# Altium PCB STM32F446xx PCB Design.PcbDoc
Units mil, origin at the board's own origin, x right, y up, seen from the top; angles counter-clockwise.
Board outline 6000 x 4000 mil, 2 copper layers (Top Layer, Bottom Layer); 48 components, 67 nets, 260 pads, 0 vias.
Unrouted connection lines stored in the file: 169.
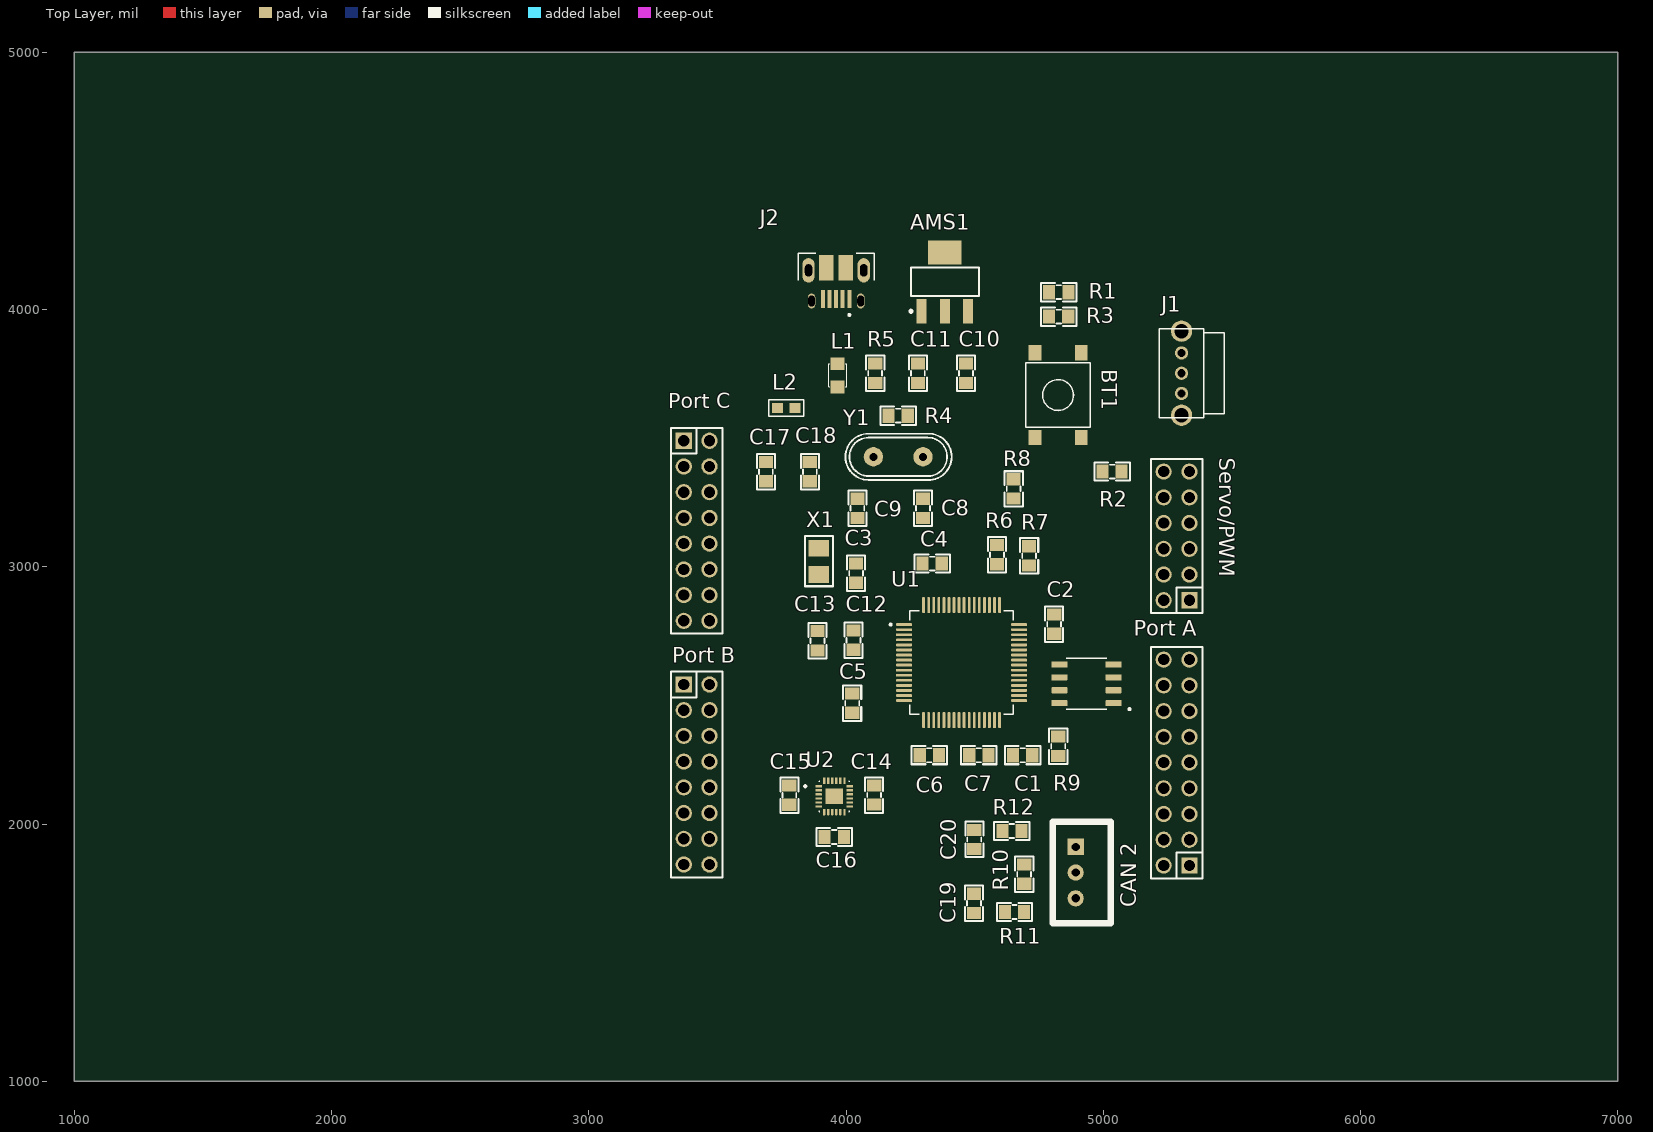
[diagram p0: Top Layer view]
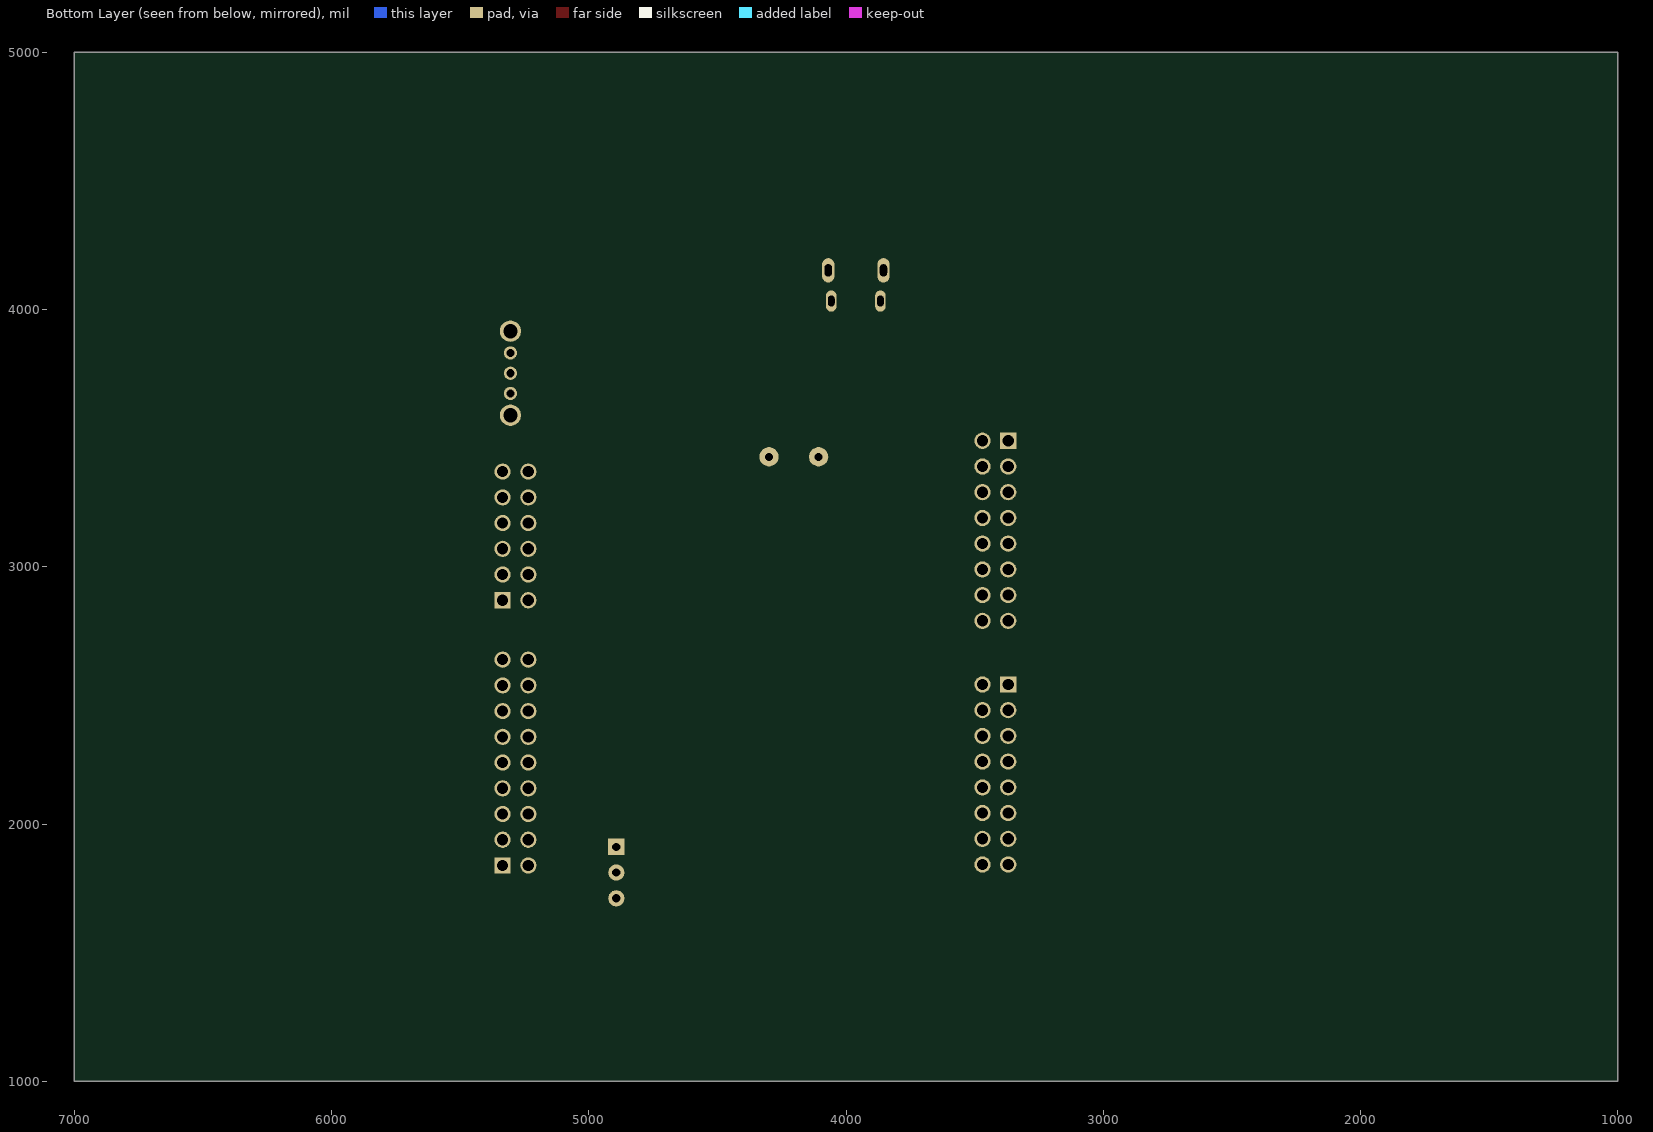
[diagram p1: Bottom Layer view, seen from below]

## Layer stack, top to bottom
Top Solder: solder mask 0.4, Solder Resist, Dk 3.5
Top Layer: signal copper 1.4
Dielectric 1: dielectric 12.6, FR-4, Dk 4.8
Bottom Layer: signal copper 1.4
Bottom Solder: solder mask 0.4, Solder Resist, Dk 3.5

## Board outline
1000,1000 7000,1000 7000,5000 1000,5000

## Design rules (kind name [scope] priority, off if disabled: settings)
Clearance [All] p1: gap=10 ignorepadtopadclearanceinfootprint=FALSE except(0: Arc-Hole Track-Hole SMDPad-Hole THPad-Hole Via-Hole Fill-Hole Poly-Hole Region-Hole Text-Hole)
PolygonConnect [All] p1: connectstyle=Relief reliefconductorwidth=10 reliefentries=4 polygonreliefangle="90 Angle" airgapwidth=10
RoomDefinition "STM32F446xx Schematic design" [InComponentClass('STM32F446xx Schematic design')] p1: confinementstyle=ConfineIn formatcopy=TRUE lockcomponents=FALSE outline 7209.38,1077.44 14919.38,1077.44 14919.38,2097.44 7209.38,2097.44
RoutingVias [All] p1: holewidth=28 width=50 viastyle="Through Hole" minholewidth=28 minwidth=50 maxholewidth=28 maxwidth=50
SolderMaskExpansion [All] p1: expansion=4 istentingtop=FALSE
Width [All] p1: maxlimit=10 minlimit=10 preferedwidth=10
30 further rules are at their usual default settings.

## Components (designator, comment, footprint, x,y, rotation, side; value= is the part's Value field where it differs from the comment)
AMS1 "AMS1117-3.3V" SOT223 4384.38,4107.44 r0 top value="AMS1117-3.3V SOT223"
BT1 "Nut Nhan 4 Chan SMD 6x6" "Nut Nhan 4 Chan SMD 6x6" 4824.38,3667.44 r90 top
C1 "100nF" "tu 0805" 4686.96,2267.3 r180 top
C2 "100nF" "tu 0805" 4809.38,2777.44 r270 top
C3 "100nF" "tu 0805" 4039.52,2975.21 r270 top
C4 "100nF" "tu 0805" 4334.38,3012.44 r0 top
C5 "100nF" "tu 0805" 4024.25,2469.86 r90 top
C6 "100nF" "tu 0805" 4324.38,2267.3 r180 top
C7 "2.2uF" "tu 0805" 4516.35,2267.3 r0 top
C8 "2.2uF" "tu 0805" 4299.38,3227.44 r270 top
C9 "2.2uF" "tu 0805" 4044.38,3227.44 r270 top
C10 "2.2uF" "tu 0805" 4466.61,3752.44 r270 top
C11 "2.2uF" "tu 0805" 4279.62,3752.44 r270 top
C12 "12pF" "tu 0805" 4029.52,2715.21 r270 top
C13 "12pF" "tu 0805" 3889.38,2712.44 r270 top
C14 "10nF" "tu 0805" 4109.38,2112.44 r90 top
C15 "100nF" "tu 0805" 3779.83,2112.44 r270 top
C16 "100nF" "tu 0805" 3954.38,1949.14 r180 top
C17 "100nF" "tu 0805" 3688.74,3370.21 r270 top
C18 "100nF" "tu 0805" 3859.52,3370.21 r270 top
C19 "560pF" "tu 0805" 4497.43,1691 r90 top
C20 "560pF" "tu 0805" 4498.73,1940 r270 top
CAN2 "CAN 2" SOIC127P599X175-8N 4935,2545 r180 top
"CAN 2" "CAN Transceiver" XH2.54M-3 4893.01,1911.18 r270 top
J1 "SK12D07VG4" SK12D07VG4 5304.38,3752.44 r90 top
J2 "10103594-0001LF" AMPHENOL_10103594-0001LF 3961.67,4152.44 r180 top
L1 "LED 0805" LED-0805-Green 3967.04,3699.15 r90 top
L2 "120R" "IND-0603 (1608)" 3767.85,3617.44 r0 top value=23R/4A
"Port A" "Port A" "JP 2x9 DT" 5285.04,2238.84 r90 top
"Port B" "Port B" "JP 2x8 DT" 3419.38,2192.44 r270 top
"Port C" "Port C" "JP 2x8 DT" 3419.38,3139.86 r270 top
R1 "10k" "tro smd 0805" 4826.81,4069.83 r0 top
R2 "10k" "tro smd 0805" 5034.38,3367.44 r180 top
R3 "10k" "tro smd 0805" 4826.61,3974.83 r0 top
R4 "1M" "tro smd 0805" 4202.93,3584.97 r180 top
R5 "1k" "tro smd 0805" 4115.9,3752.54 r270 top
R6 "20R" "tro smd 0805" 4589.38,3047.44 r270 top
R7 "20R" "tro smd 0805" 4714.38,3042.44 r270 top
R8 "4.7K" "tro smd 0805" 4649.38,3302.44 r90 top
R9 "4k7" "tro smd 0805" 4822.61,2302.23 r90 top
R10 "120R" "tro smd 0805" 4695,1805 r270 top
R11 "100R" "tro smd 0805" 4655,1660 r0 top
R12 "100R" "tro smd 0805" 4645,1975 r0 top
Servo/PWM "Servo/PWM" "JP 2x6 DT" 5285.04,3119.83 r90 top
U1 "STM32F446RET6" QFP50P1200X1200X160-64N 4449.38,2627.44 r0 top
U2 "MPU-9250" QFN40P300X300X105-25N 3954.38,2107.44 r0 top
X1 "32.768KHz" Crystal_ABS07_SMD-3.2x1.5MM 3894.38,3021.26 r270 top
Y1 "16Mhz" "Thach Anh 2 chan cam" 4202.93,3427.44 r180 top value=4Mhz

## Footprints (in the part's own frame and the unit in brackets; to place one, negate y for a bottom-side part, rotate by r counter-clockwise, add the part's x,y. Pads: shape width x height; smd on the part's side, far side on the other; paste and mask are expansions set on the pad)
AMPHENOL_10103594-0001LF [mm]
  rect 0.4x1.75 smd: 1(-1.3,2.825) 2(-0.65,2.825) 3(0,2.825) 4(0.65,2.825) 5(1.3,2.825)
  oval 0.73x1.46 hole 0.65 slot 1.05 at 90 deg mask+0: 6(-2.425,3.03) 7(2.425,3.03)
  oval 1.2x2.4 hole 0.7 slot 1.2 at 90 deg: 8(-2.725,0) 9(2.725,0)
  oval 1.05x2.1 smd far side paste-2: 10(-2.425,3.03) 11(2.425,3.03)
  rect 1.425x2.5 smd: S1(-0.962,-0.25) S2(0.962,-0.25)
  silkscreen extent -3.75,-1.7 3.75,4.5, body extent -4.02,-4.15 4.02,1.88, height 2.95
Crystal_ABS07_SMD-3.2x1.5MM [mm] "Crystal 3.2x1.5mm"
  rect 1.65x2 smd: 1(-1.3,0) 2(1.3,0)
  silkscreen extent -2.49,-1.37 2.46,1.38, body extent -1.6,-0.75 1.6,0.75, height 0.81
"IND-0603 (1608)" [mm] "Resistor, Chip; 1.60 mm L X 0.80 mm W X 0.50 mm H body"
  rect 1.1x1 smd mask+0.1: 1(-0.85,0) 2(0.85,0)
  silkscreen extent -1.71,-0.81 1.71,0.81, body extent -0.92,-0.56 0.92,0.56, height 0.9
"JP 2x6 DT" [mm] "12 pins, dual pin, straight, gold plating"
  rect 1.6x1.6 hole 1.1: 1(-6.35,-1.27)
  round 1.6 hole 1.1: 2(-3.81,-1.27) 3(-1.27,-1.27) 4(1.27,-1.27) 5(3.81,-1.27) 6(6.35,-1.27) 7(6.35,1.27) 8(3.81,1.27) 9(1.27,1.27) 10(-1.27,1.27) 11(-3.81,1.27) 12(-6.35,1.27)
  silkscreen extent -7.62,-2.54 7.62,2.54, body extent -7.62,-2.54 7.62,2.54, height 8.55
"JP 2x8 DT" [mm] "16 pins, dual pin, straight, gold plating"
  rect 1.6x1.6 hole 1.1: 1(-8.89,-1.27)
  round 1.6 hole 1.1: 2(-6.35,-1.27) 3(-3.81,-1.27) 4(-1.27,-1.27) 5(1.27,-1.27) 6(3.81,-1.27) 7(6.35,-1.27) 8(8.89,-1.27) 9(8.89,1.27) 10(6.35,1.27) 11(3.81,1.27) 12(1.27,1.27) 13(-1.27,1.27) 14(-3.81,1.27) 15(-6.35,1.27) 16(-8.89,1.27)
  silkscreen extent -10.16,-2.54 10.16,2.54, body extent -10.16,-2.54 10.16,2.54, height 8.55
"JP 2x9 DT" [mm] "18 pins, dual pin, straight, gold plating"
  rect 1.6x1.6 hole 1.1: 1(-10.16,-1.27)
  round 1.6 hole 1.1: 2(-7.62,-1.27) 3(-5.08,-1.27) 4(-2.54,-1.27) 5(0,-1.27) 6(2.54,-1.27) 7(5.08,-1.27) 8(7.62,-1.27) 9(10.16,-1.27) 10(10.16,1.27) 11(7.62,1.27) 12(5.08,1.27) 13(2.54,1.27) 14(0,1.27) 15(-2.54,1.27) 16(-5.08,1.27) 17(-7.62,1.27) 18(-10.16,1.27)
  silkscreen extent -11.43,-2.54 11.43,2.54, body extent -11.43,-2.54 11.43,2.54, height 8.55
LED-0805-Green [mil]
  rect 50x55 smd: 1(0,0) 2(90,0)
  silkscreen extent 0,-35 90,35, body extent 5,-25 85,25, height 43
"Nut Nhan 4 Chan SMD 6x6" [mil] "SW SMD button 4pin, 250 x250 mil"
  rect 60x50 smd: 1(-165,90) 2(165,-90) 3(165,90) 4(-165,-90)
  silkscreen extent -125,-125 125,125, body extent -180,-125 180,125, height 130
QFN40P300X300X105-25N [mm]
  rrect25% 0.64x0.22 smd: 1(-1.545,1) 2(-1.545,0.6) 3(-1.545,0.2) 4(-1.545,-0.2) 5(-1.545,-0.6) 6(-1.545,-1) 13(1.545,-1) 14(1.545,-0.6) 15(1.545,-0.2) 16(1.545,0.2) 17(1.545,0.6) 18(1.545,1)
  rrect25% 0.22x0.64 smd: 7(-1,-1.545) 8(-0.6,-1.545) 9(-0.2,-1.545) 10(0.2,-1.545) 11(0.6,-1.545) 12(1,-1.545) 19(1,1.545) 20(0.6,1.545) 21(0.2,1.545) 22(-0.2,1.545) 23(-0.6,1.545) 24(-1,1.545)
  rect 1.7x1.54 smd paste-2: 25(0,0)
  silkscreen extent -2.96,-1.5 1.5,1.5, body extent -1.5,-1.5 1.5,1.5, height 1
QFP50P1200X1200X160-64N [mm]
  rrect50% 1.56x0.28 smd: 1(-5.68,3.75) 2(-5.68,3.25) 3(-5.68,2.75) 4(-5.68,2.25) 5(-5.68,1.75) 6(-5.68,1.25) 7(-5.68,0.75) 8(-5.68,0.25) 9(-5.68,-0.25) 10(-5.68,-0.75) 11(-5.68,-1.25) 12(-5.68,-1.75) 13(-5.68,-2.25) 14(-5.68,-2.75) 15(-5.68,-3.25) 16(-5.68,-3.75) 33(5.68,-3.75) 34(5.68,-3.25) 35(5.68,-2.75) 36(5.68,-2.25) 37(5.68,-1.75) 38(5.68,-1.25) 39(5.68,-0.75) 40(5.68,-0.25) 41(5.68,0.25) 42(5.68,0.75) 43(5.68,1.25) 44(5.68,1.75) 45(5.68,2.25) 46(5.68,2.75) 47(5.68,3.25) 48(5.68,3.75)
  rrect50% 0.28x1.56 smd: 17(-3.75,-5.68) 18(-3.25,-5.68) 19(-2.75,-5.68) 20(-2.25,-5.68) 21(-1.75,-5.68) 22(-1.25,-5.68) 23(-0.75,-5.68) 24(-0.25,-5.68) 25(0.25,-5.68) 26(0.75,-5.68) 27(1.25,-5.68) 28(1.75,-5.68) 29(2.25,-5.68) 30(2.75,-5.68) 31(3.25,-5.68) 32(3.75,-5.68) 49(3.75,5.68) 50(3.25,5.68) 51(2.75,5.68) 52(2.25,5.68) 53(1.75,5.68) 54(1.25,5.68) 55(0.75,5.68) 56(0.25,5.68) 57(-0.25,5.68) 58(-0.75,5.68) 59(-1.25,5.68) 60(-1.75,5.68) 61(-2.25,5.68) 62(-2.75,5.68) 63(-3.25,5.68) 64(-3.75,5.68)
  silkscreen extent -7.1,-5.1 5.1,5.1
SK12D07VG4 [mm]
  round 1.308 hole 0.8: 1(-2,0) 2(2,0) COM(0,0)
  round 2.1 hole 1.4: M1(-4.15,0) M2(4.15,0)
  silkscreen extent -4.4,-4.2 4.4,2.2
SOIC127P599X175-8N [mm]
  rrect25% 1.58x0.6 smd: 1(-2.67,1.905) 2(-2.67,0.635) 3(-2.67,-0.635) 4(-2.67,-1.905) 5(2.67,-1.905) 6(2.67,-0.635) 7(2.67,0.635) 8(2.67,1.905)
  silkscreen extent -4.35,-2.52 1.99,2.6, body extent -3,-2.45 3,2.45, height 1.75
SOT223 [mm]
  rect 1x2.4 smd: 1(-2.3,-2.9) 2(0,-2.9) 3(2.3,-2.9)
  rect 3.3x2.4 smd: 4(0,2.9)
  silkscreen extent -3.47,-3.02 3.35,1.4, body extent -3.25,-3.56 3.25,3.4, height 1.68
"Thach Anh 2 chan cam" [mm]
  round 1.905 hole 0.8: 1(-2.45,0) 2(2.45,0)
  silkscreen extent -5.28,-2.29 5.21,2.29, body extent -5.68,-2.36 5.68,2.29, height 3.5
"tro smd 0805" [mm]
  rect 1.2x1.4 smd: 1(-0.946,-0.061) 2(0.954,-0.061)
  silkscreen extent -1.75,-0.97 1.75,0.84, body extent -1.56,-0.76 1.44,0.64, height 0.53
"tu 0805" [mm] "Compoment SMD 80x50mil"
  rect 1.2x1.4 smd: 1(-0.946,-0.003) 2(0.954,-0.003)
  silkscreen extent -1.75,-0.89 1.75,0.89, body extent -1.01,-0.64 1.01,0.63, height 0.61
XH2.54M-3 [mm]
  rect 1.6x1.6 hole 0.8: 1(0,0)
  round 1.6 hole 0.8: 2(2.54,0) 3(5.08,0)
  silkscreen extent -2.48,-2.26 7.56,3.46, body extent -2.48,-2.26 7.56,3.48, height 6.91

## Part data
AMS1: library part "AMS1117 SMD", "Dán", Chung_Loai=Dán, Don_Vi=Con, Ma_Hang=MH000596
BT1: "Nut Nhan 4 Chan 6.2x6.2x3.5", Ma_Hang=MH002424, Ten="Nút Nhấn 4 Chân 6.2x6.2x3.1MM SMD"
C1 C2 C3 C4 C5 C6 C7 C8 C9 C10 C11 C12 C13: library part "Tu 0805 10pF 50V 10%", "Dán", Chung_Loai=Dán, Don_Vi=Con, Ma_Hang=MH004554, So_Chan=2, Ten_Linh_Kien="Tụ 0805 10P 10% 50V"
C14 C15 C16 C17 C18 C19 C20: library part "Tu 0805 106 16V 10%", "Dán", Chung_Loai=Dán, Don_Vi=Con, Ma_Hang=MH004553, So_Chan=2, Ten_Linh_Kien="Tụ 0805 106-10uF 10% 16V"
CAN2: library part MCP2551-I/SN, Package=None, Availability=Unavailable, MF="{'manufacturer': u'Microchip Technology'}", MP=MCP2551-I/SN, Price=None
"CAN 2": library part "Header 3P 2.54 Duc Thang", "Cắm", Chung_Loai=Cắm, Don_Vi=Con, Ma_Hang=MH001292, Ten_Linh_Kien="Header 3P XH2.54-3P Đực Thẳng"
J1: "Switch Slide ON ON SPDT Side Slide 0.3A 30VDC PC Pins Bracket Mount/Through Hole Bulk", Package=None, Availability="Not in stock", Check_prices=https://www.snapeda.com/parts/SK12D07VG4/C&K/view-part/6618061/?ref=eda, MF=C&K, MP=SK12D07VG4, Price=None, SnapEDA_Link=https://www.snapeda.com/parts/SK12D07VG4/C&K/view-part/6618061/?ref=snap
J2: "USB - micro B USB 2.0 Receptacle Connector 5 Position Surface Mount, Right Angle; Through Hole", Package=None, Availability=Unavailable, MF="{'manufacturer': u'FCI Connectors'}", MP=10103594-0001LF, Price=None
L1: library part "LED 0805 Xanh La", "Dán", Chung_Loai=Dán, Don_Vi=Con, Ma_Hang=MH002326, Ten_Linh_Kien="LED 0805 Màu Xanh Lá (Green)"
L2: library part FBMJ1608HM230NT, "IND-FERRITE BEAD 23 OHM  4A 0603 1LN", Category="FERRITE BEAD", CompanyID=VT-01060, MPN=FBMJ1608HM230NT, PinCount=2, Solder=SMT
"Port A": library part "JP 2x9 2.54 Duc Thang", "Cắm", Chung_Loai=Cắm, Don_Vi=Con, Ma_Hang=MH002686, Ten_Linh_Kien="Jump Đôi Đực 2.54MM 2x40P Thẳng 11MM"
"Port B" "Port C": library part "JP 2x8 2.54 Duc Thang", "Cắm", Chung_Loai=Cắm, Don_Vi=Con, Ma_Hang=MH002686, Ten_Linh_Kien="Jump Đôi Đực 2.54MM 2x40P Thẳng 11MM"
R1 R2 R3 R4 R5: library part "Tro 0805 1% 1k", "Dán", Chung_Loai=Dán, Don_Vi=Con, Ma_Hang=MH005468, So_Chan=2, Ten_Linh_Kien="Trở 0805 1% 1k"
R6 R7 R8 R9 R10 R11 R12: library part "Tro 0805 1% 10k", "Dán", Chung_Loai=Dán, Don_Vi=Con, Ma_Hang=MH005473, So_Chan=2, Ten_Linh_Kien="Trở 0805 1% 10k"
Servo/PWM: library part "JP 2x6 2.54 Duc Thang", "Cắm", Chung_Loai=Cắm, Don_Vi=Con, Ma_Hang=MH002686, Ten_Linh_Kien="Jump Đôi Đực 2.54MM 2x40P Thẳng 11MM"
U1: "MCU 32-Bit STM32 ARM Cortex M4 RISC 512KB Flash 2.5V/3.3V 64-Pin LQFP Tray", Package=None, Availability=Unavailable, MF="{'manufacturer': u'STMicroelectronics'}", MP=STM32F446RET6, Price=None
U2: Package=None, Availability=Unavailable, MF="{'manufacturer': u'TDK InvenSense'}", MP=MPU-9250, Price=None
X1: library part ABS07-32.768KHZ-T, "CRYSTAL 32.7680KHZ 12.5pF SMD", Category=CRYSTAL, CompanyID=VT-01153, MPN=ABS07-32.768KHZ-T, Solder=SMT
Y1: library part "Thach Anh 2 chan Cam", "Crystal For all Crystal 2pin."

## Nets (pads, with @x,y where several pads share a name; then routed paths per layer and width w, separated by ;. In a path a pad name is that pad's centre, name@x,y a point inside that pad or via, vN(x,y) a via of type N, cw(c..) or ccw(c..) an arc to the next point about the centre after c; other vN are vias at no path point)
+3.3V: AMS1.2 AMS1.4 C1.1 C2.1 C3.1 C4.1 C5.1 C6.1 C7.1 C11.1 C14.1 C15.1 CAN2.3 L1.1 R1.1 R3.1 R8.2 U1.1 U1.13 U1.19 U1.30 U1.32 U1.48 U1.64 U2.1 U2.8 U2.13
+5V: "Port A.18" AMS1.3 C10.1 C17.1 L2.1 Servo/PWM.1 Servo/PWM.4 Servo/PWM.9 Servo/PWM.12
Boot: J1.2 R1.2
CANH: "CAN 2.3" CAN2.7 R10.2 R11.2
CANL: "CAN 2.2" CAN2.6 R10.1 R12.2
GND: "CAN 2.1" "Port A.17" "Port B.9" "Port C.8" AMS1.1 BT1.2 BT1.4 C1.2 C2.2 C3.2 C4.2 C5.2 C6.2 C7.2 C8.2 C9.2 C10.2 C11.2 C12.2 C13.2 C14.2 C15.2 C16.1 C17.2 C18.2 C19.2 C20.2 CAN2.2 J2.5 R2.2 R5.2 R9.1 Servo/PWM.3 Servo/PWM.6 Servo/PWM.7 Servo/PWM.10 U1.12 U1.18 U1.31 U1.47 U1.63 U2.11 U2.18 U2.20 U2.25
IMU_CS: "Port A.5" U1.20 U2.22
IMU_INT: "Port A.4" U1.17 U2.12
MCU/Boot: J1.COM U1.60
MCU/OSC32_IN: C12.1 U1.3 X1.1
MCU/OSC32_OUT: C13.1 U1.4 X1.2
MCU/OSC_IN: C8.1 R4.1 U1.5 Y1.1
MCU/OSC_OUT: C9.1 R4.2 U1.6 Y1.2
MCU/PA0/Analog_IN0: "Port A.1" U1.14
MCU/PA1/Analog_IN1: "Port A.2" U1.15
MCU/PA2/Analog_IN2: "Port A.3" U1.16
MCU/PA5/Analog_IN5/TIM2_CH1: "Port A.6" U1.21 U2.23
MCU/PA6/Analog_IN6/TIM3_CH1: "Port A.7" U1.22 U2.9
MCU/PA7/Analog_IN7/TIM3_CH2: "Port A.8" U1.23 U2.24
MCU/PA8/TIM1_CH1: "Port A.9" Servo/PWM.2 U1.41
MCU/PA9/TIM1_CH2: "Port A.16" Servo/PWM.11 U1.42
MCU/PA10/TIM1_CH3: "Port A.15" Servo/PWM.5 U1.43
MCU/PA11/TIM1_CH4: "Port A.14" R6.2 Servo/PWM.8 U1.44
MCU/PA12: "Port A.13" R7.2 R8.1 U1.45
MCU/PA13: "Port A.12" U1.46
MCU/PA14: "Port A.11" U1.49
MCU/PA15: "Port A.10" U1.50
MCU/PB0/Analog_IN8/TIM3_CH3: "Port B.1" U1.26
MCU/PB1/Analog_IN9/TIM3_CH4: "Port B.2" U1.27
MCU/PB2/TIM2_CH4: "Port B.3" U1.28
MCU/PB3/TIM2_CH2: "Port B.4" U1.55
MCU/PB4: "Port B.5" U1.56
MCU/PB5: "Port B.6" U1.57
MCU/PB6: "Port B.7" U1.58
MCU/PB7: "Port B.8" U1.59
MCU/PB8: "Port B.16" U1.61
MCU/PB9: "Port B.15" U1.62
MCU/PB10/TIM2_CH3: "Port B.14" U1.29
MCU/PB12/CAN_Rx: "Port B.13" CAN2.4 U1.33
MCU/PB13/CAN_Tx: "Port B.12" CAN2.1 U1.34
MCU/PB14: "Port B.11" U1.35
MCU/PB15: "Port B.10" U1.36
MCU/PC0/Analog_IN10: "Port C.1" U1.8
MCU/PC1/Analog_IN11: "Port C.2" U1.9
MCU/PC2/Analog_IN12: "Port C.3" U1.10
MCU/PC3/Analog_IN13: "Port C.4" U1.11
MCU/PC4/Analog_IN14: "Port C.5" U1.24
MCU/PC5/Analog_IN15: "Port C.6" U1.25
MCU/PC6: "Port C.7" U1.37
MCU/PC7: "Port C.16" U1.38
MCU/PC8: "Port C.15" U1.39
MCU/PC9: "Port C.14" U1.40
MCU/PC10: "Port C.13" U1.51
MCU/PC11: "Port C.12" U1.52
MCU/PC12: "Port C.11" U1.53
MCU/PC13: "Port C.10" U1.2
MCU/PD2: "Port C.9" U1.54
NetC16_2: C16.2 U2.10
NetC19_1: C19.1 R11.1
NetC20_1: C20.1 R12.1
NetCAN2_8: CAN2.8 R9.2
NetJ2_2: J2.2 R6.1
NetJ2_3: J2.3 R7.1
NetL1_2: L1.2 R5.1
NRST: BT1.1 BT1.3 R3.2 U1.7
Operate: J1.1 R2.1
VCC: C18.1 J2.1 L2.2
pads on no net: CAN2.5 J1.M1 J1.M2 J2.4 J2.6 J2.7 J2.8 J2.9 J2.10 J2.11 J2.S1 J2.S2 U2.2 U2.3 U2.4 U2.5 U2.6 U2.7 U2.14 U2.15 U2.16 U2.17 U2.19 U2.21

## Text inside footprints (layer, text, board x,y; h text height)
J2: Mechanical 13 "PCB EDGE" at 4121.67,4431.22 h32 r180